# Altium PCB MFC.PcbDoc
Units mm, origin at the board's own origin, x right, y up, seen from the top; angles counter-clockwise.
Board outline 54.12 x 48.52 mm, 2 copper layers (Top Layer, Bottom Layer); 23 components, 32 nets, 102 pads, 91 vias.
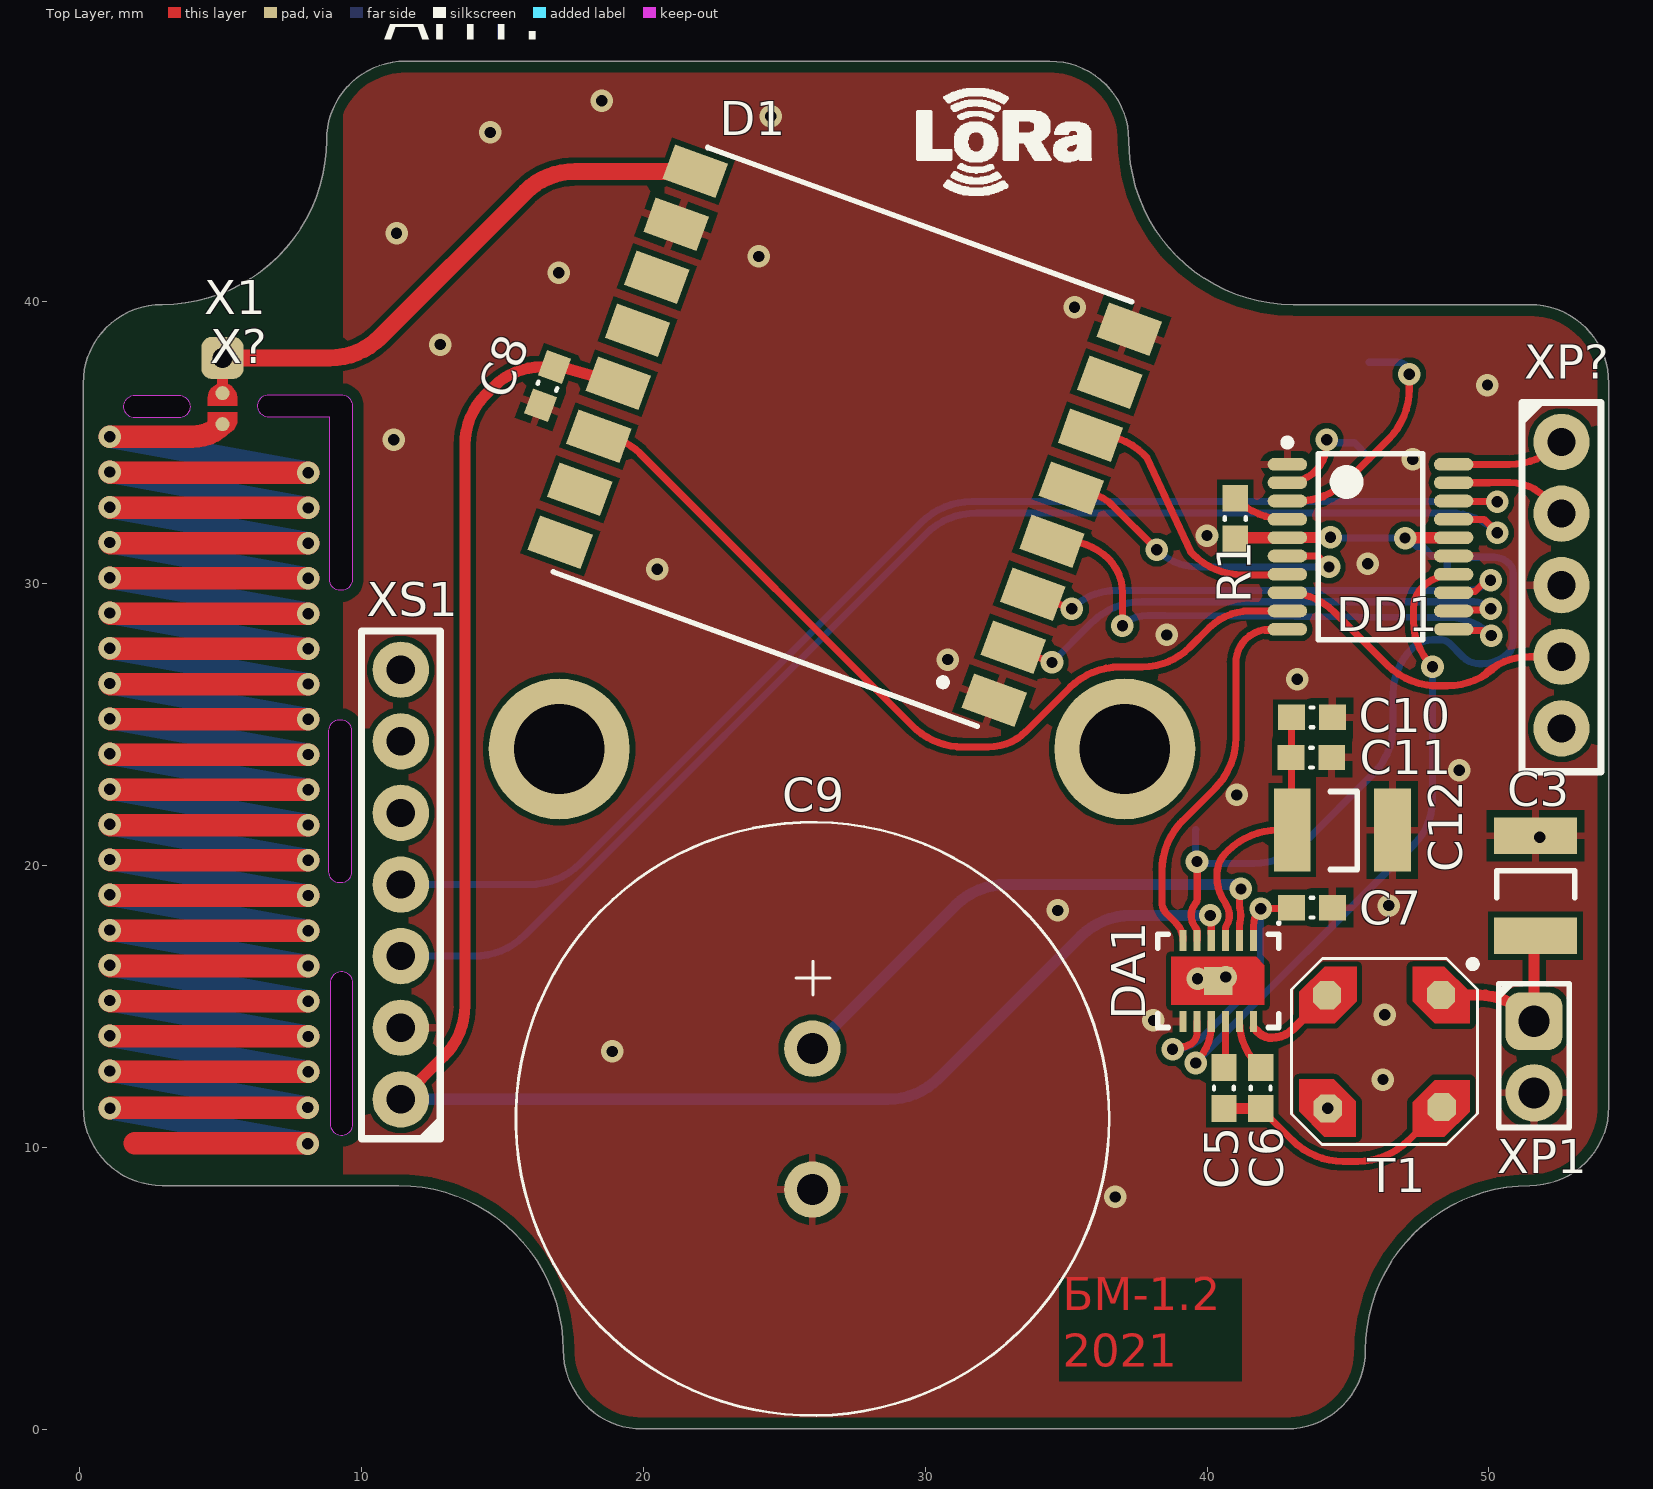
[diagram p0: Top Layer view]
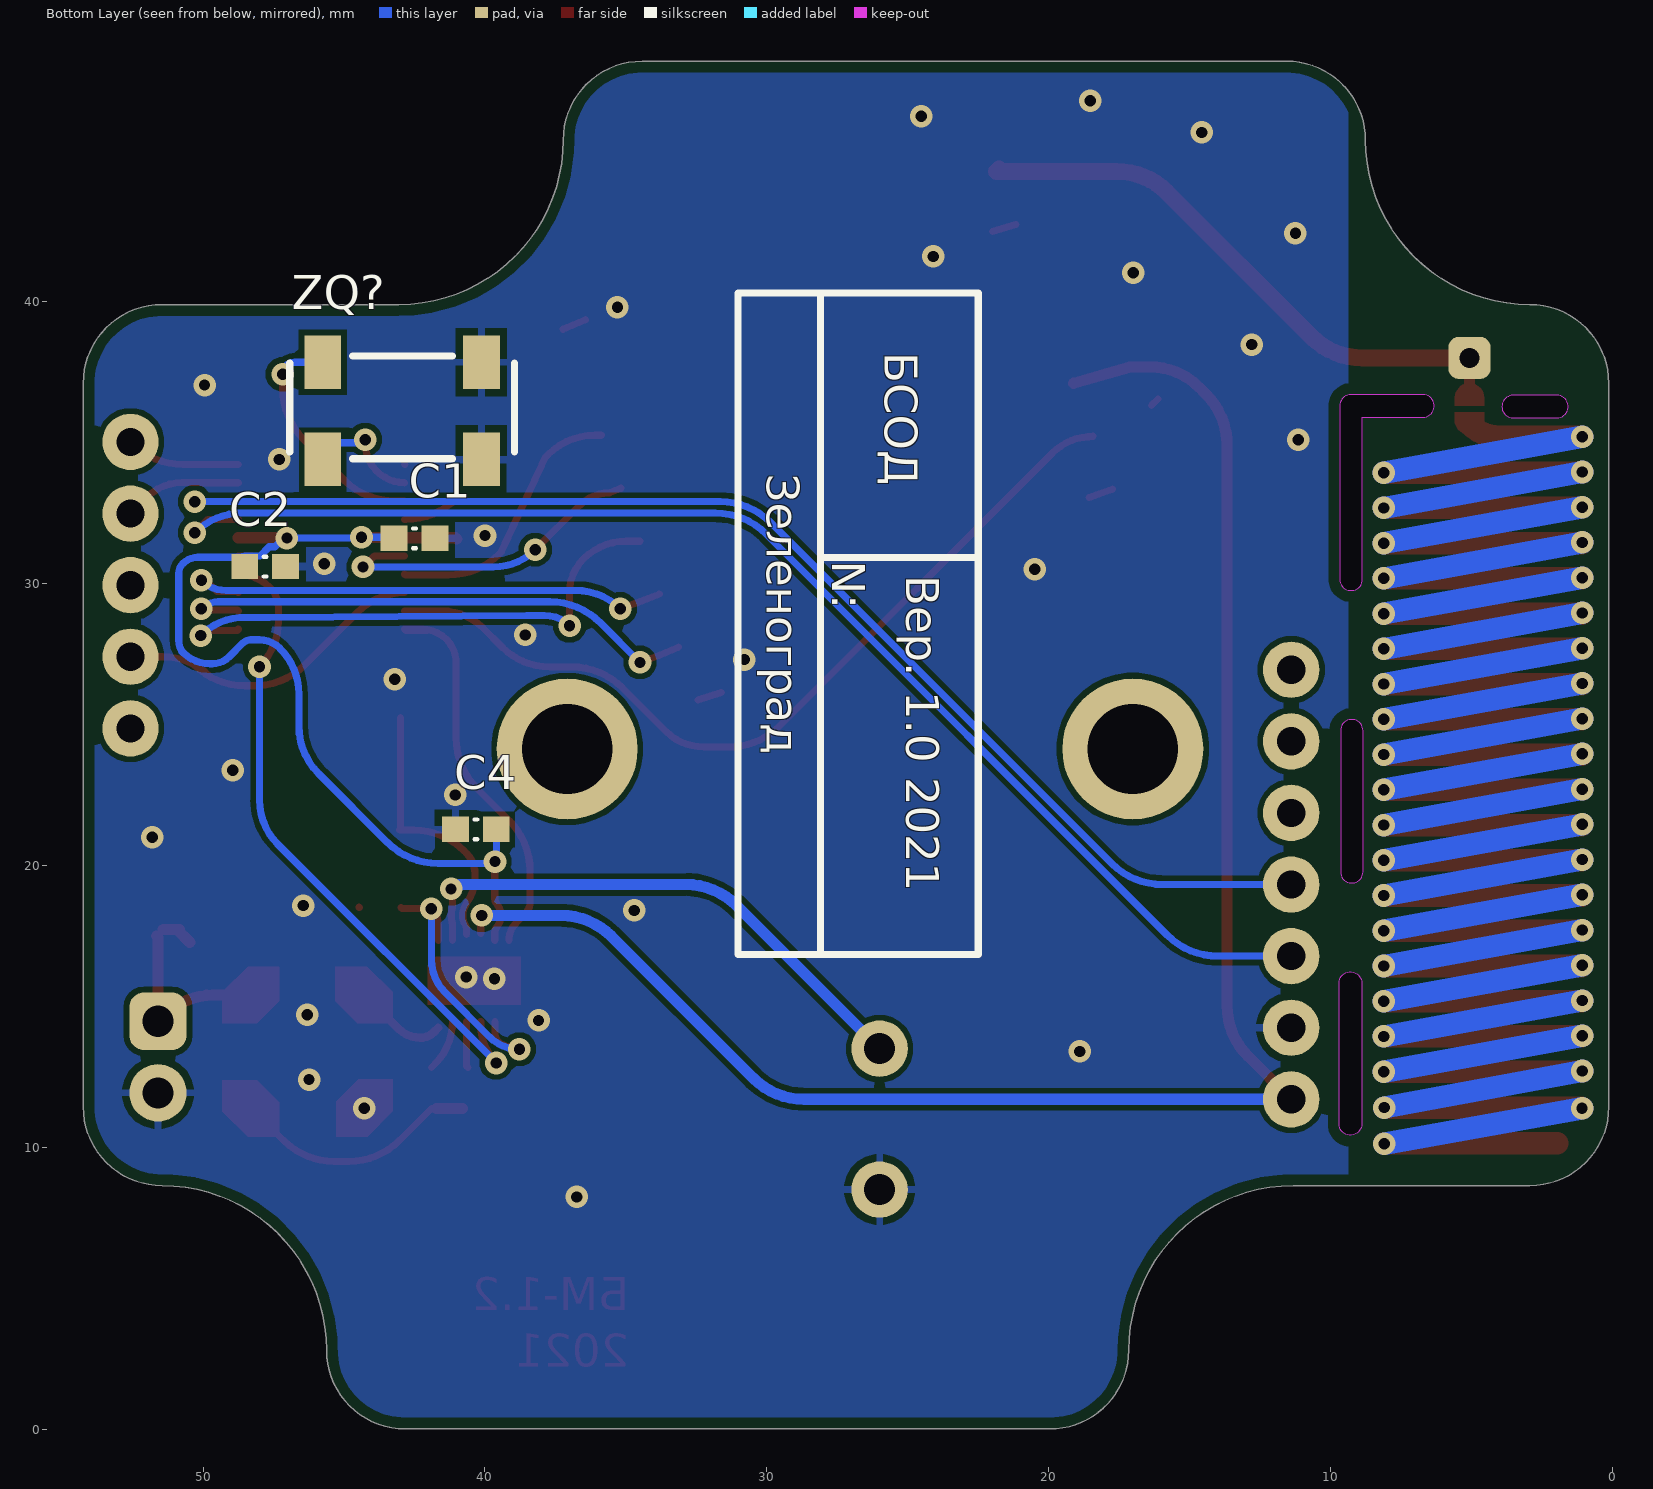
[diagram p1: Bottom Layer view, seen from below]

## Layer stack, top to bottom
Top Solder: solder mask 0.0102, Solder Resist, Dk 3.5
Top Layer: signal copper 0.0356
Dielectric 1: dielectric 0.32, FR-4, Dk 4.8
Bottom Layer: signal copper 0.0356
Bottom Solder: solder mask 0.0102, Solder Resist, Dk 3.5

## Board outline
2.933,8.637 11.33,8.637 cw(c11.33,2.806) 17.162,2.806 ccw(c19.962,2.806) 19.962,0.006 42.822,0.006 ccw(c42.822,2.806) 45.621,2.806 cw(c51.453,2.806) 51.453,8.637 ccw(c51.453,11.437) 54.253,11.437 54.253,37.097 ccw(c51.453,37.097) 51.453,39.896 43.055,39.896 cw(c43.055,45.728) 37.224,45.728 ccw(c34.424,45.728) 34.424,48.527 11.564,48.527 ccw(c11.564,45.728) 8.764,45.728 cw(c2.933,45.728) 2.933,39.896 ccw(c2.933,37.097) 0.133,37.097 0.133,11.437 ccw(c2.933,11.437)
cut-out: 6.725,35.9 cw(c6.725,36.3) 6.725,36.7 9.275,36.7 cw(c9.275,36.3) 9.675,36.3 9.675,30.15 cw(c9.275,30.15) 8.875,30.15 8.875,35.9
cut-out: 6.725,35.9 cw(c6.725,36.3) 6.725,36.7 9.275,36.7 cw(c9.275,36.3) 9.675,36.3 9.675,30.15 cw(c9.275,30.15) 8.875,30.15 8.875,35.9
cut-out: 1.975,35.875 cw(c1.975,36.275) 1.975,36.675 3.525,36.675 cw(c3.525,36.275) 3.925,36.275 cw(c3.525,36.275) 3.525,35.875
cut-out: 8.9,10.825 ccw(c9.3,10.825) 9.7,10.825 9.7,15.825 ccw(c9.3,15.825) 8.9,15.825
cut-out: 8.85,19.775 8.85,24.775 cw(c9.25,24.775) 9.65,24.775 9.65,19.775 cw(c9.25,19.775)

## Design rules (kind name [scope] priority, off if disabled: settings)
BoardOutlineClearance [All] p1: gap=0.4 ignorepadtopadclearanceinfootprint=FALSE
Clearance [All] p1: gap=0.2 ignorepadtopadclearanceinfootprint=FALSE except(0.125: Arc-Arc Arc-Track Arc-SMDPad Arc-THPad Arc-Via Arc-Text Track-Track Track-SMDPad Track-THPad Track-Via Track-Text SMDPad-Via SMDPad-Text THPad-THPad THPad-Via THPad-Text Via-Via Via-Text Fill-Text Poly-Text Region-Text Text-Text; 0.25: Arc-Hole Track-Hole SMDPad-Hole THPad-Hole Via-Hole Fill-Hole Poly-Hole Region-Hole Text-Hole)
ComponentClearance [All] p1: gap=0 collisioncheckmode=3 verticalgap=0.254 showdistances=FALSE
DiffPairsRouting [All] p1: maxlimit=0.254 minlimit=0.15 mostfreqgap=0.254 toplayer_minwidth=0.2 toplayer_maxwidth=0.381 toplayer_prefwidth=0.254 bottomlayer_minwidth=0.2 bottomlayer_maxwidth=0.381 bottomlayer_prefwidth=0.254 maxuncoupledlength=12.7
HoleSize [All] p1: absolutevalues=TRUE maxlimit=100 minlimit=0.3 maxpercent=80.000 minpercent=20.000
MinimumAnnularRing [All] p1: minimumring=0.15
MinimumSolderMaskSliver [All] p1: minsoldermaskwidth=0.15
PolygonConnect [All] p1: thpad.connectstyle=Relief thpad.reliefconductorwidth=0.254 thpad.reliefentries=4 thpad.polygonreliefangle="90 Angle" thpad.airgapwidth=0.254 smdpad.connectstyle=Relief smdpad.reliefconductorwidth=0.254 smdpad.reliefentries=4 smdpad.polygonreliefangle="90 Angle" smdpad.airgapwidth=0.254 via.connectstyle=Direct via.reliefconductorwidth=0.254 via.reliefentries=4 via.polygonreliefangle="90 Angle" via.airgapwidth=0.254
RoutingVias [All] p1: holewidth=0.4 width=0.8 viastyle="Through Hole" minholewidth=0.3 minwidth=0.8 maxholewidth=0.8 maxwidth=1.27
SilkToSilkClearance [All] p1 off: silktosilkclearance=0.15
SilkToSolderMaskClearance [IsPad] p1: minsilkscreentomaskgap=0.1 clearancetoexposedcopper=TRUE
SolderMaskExpansion [All] p1: expansion=0.102 istentingtop=FALSE
Width [All] p1: maxlimit=1 minlimit=0.125 preferedwidth=0.254
24 further rules are at their usual default settings.

## Components (designator, comment, footprint, x,y, rotation, side; value= is the part's Value field where it differs from the comment)
C1 "0,1 мк" C_0603 42.5,31.6 r0 bottom value=0.1µF
C2 "0,1 мк" C_0603 47.8,30.6 r0 bottom value=0.1µF
C3 "220 мк" B_CASE 51.65,19.275 r90 top value=220µF
C4 "0,1 мк" C_0603 40.325,21.275 r180 bottom value=0.1µF
C5 "1000" C_0603 40.6,12.1 r90 top value=1000pF
C6 "220" C_0603 41.9,12.1 r90 top value=220pF
C7 "2,2 мк" C_0603 43.725,18.5 r180 top value=2.2µF
C8 "0,1 мк" C_0603 16.6,37 r70 top value=0.1µF
C9 "1Ф 5,5В" EECF5R5U 26,11 r270 top locked
C10 "2,2 мк" C_0603 43.725,25.25 r180 top value=2.2µF
C11 "0,1 мк" C_0603 43.7,23.825 r180 top value=0.1µF
C12 "220 мк" B_CASE 44.8,21.25 r0 top value=220µF
D1 "RFM98W" RFM98W 37.343,40.043 r160 top
DA1 "LTC3108EDE" DFN-12 40.4,15.9 r270 top
DD1 "STM32L010F4P6" TSSOP-20 45.8,31.3 r0 top
R1 "10 к" R_0603 41,32.3 r90 top
T1 "1 : 100" LPR6235 46.3,13.3 r270 top
X1 "КТ" KT 5.075,38 r0 top
X? "Solder_jumper" Solder_jumper 5.075,36.225 r270 top
XP1 "PLS-2" PLS-2 51.6,13.2 r0 top
XP? "PLS-5" PLS-5 52.575,35.02 r270 top
XS1 "PBS-7" PBS-7 11.4,11.7 r90 top
ZQ? "KX-327S" KX-327S 42.9,36.375 r180 bottom

## Footprints (in the part's own frame and the unit in brackets; to place one, negate y for a bottom-side part, rotate by r counter-clockwise, add the part's x,y. Pads: shape width x height; smd on the part's side, far side on the other; paste and mask are expansions set on the pad)
B_CASE [mm] "Chip Capacitor, 2-Leads, Body 3,50x2,80mm, IPC Medium Density"
  rect 1.3x2.95 smd: 1(-1.778,0) 2(1.778,0)
  silkscreen extent -0.42,-1.4 0.53,1.37, body extent -1.85,-1.46 1.85,1.47, height 2.03
C_0603 [mm] "Chip Resistor, 2-Leads, Body 1.60x0.80mm, IPC Medium Density"
  rect 0.95x0.9 smd: 1(-0.725,0) 2(0.725,0)
  silkscreen extent -0.05,-0.35 0.05,0.35, body extent -0.8,-0.4 0.8,0.4, height 0.8
DFN-12 [mm] "SON, 12-Leads, Body 4.00x3.00mm, Pitch 0.50mm, Thermal Pad 3.30x1.70mm, IPC Medium Density"
  rect 0.75x0.25 smd: 1(-1.44,1.25) 2(-1.44,0.75) 3(-1.44,0.25) 4(-1.44,-0.25) 5(-1.44,-0.75) 6(-1.44,-1.25) 7(1.44,-1.25) 8(1.44,-0.75) 9(1.44,-0.25) 10(1.44,0.25) 11(1.44,0.75) 12(1.44,1.25)
  rect 1x1 smd: 13(0,0)
  Top Layer region: -0.855,-1.662 -0.855,1.338 -0.555,1.638 0.845,1.638 0.845,-1.662
  silkscreen extent -2.1,-2.15 1.65,2.2, body extent -1.5,-2 1.5,2, height 0.75
EECF5R5U [mm]
  round 2 hole 1.1: 1(-2.5,0) 2(2.5,0)
  silkscreen extent -10.53,-10.52 10.52,10.53, body extent -10.75,-10.75 10.76,10.75, height 8.01
KT [mm]
  rrect50% 1.5x1.5 hole 0.7: 1(0,0)
KX-327S [mm]
  rect 1.3x1.9 smd: 1(-2.85,-1.975) 2(2.775,-1.975) 3(2.775,1.475) 4(-2.85,1.475)
  silkscreen extent -4.03,-1.95 3.95,1.7, body extent -4.03,-2 3.97,1.7, height 2.5
LPR6235 [mm]
  oct 1x1 smd: 1(-2.1,2) 2(-2.091,-2.046) 3(1.921,-2.016) 4(1.875,2.025)
  Top Layer region: -3.1,2.121 -2.225,3.021 -1.1,3.021 -1.1,1.771 -1.875,0.996 -3.1,0.996
  Top Layer region: -3.1,-2.121 -2.225,-3.021 -1.1,-3.021 -1.1,-1.771 -1.875,-0.996 -3.1,-0.996
  Top Layer region: 2.021,-3.021 2.921,-2.146 2.921,-1.021 1.671,-1.021 0.896,-1.796 0.896,-3.021
  Top Layer region: 2.921,2.121 2.046,3.021 0.921,3.021 0.921,1.771 1.696,0.996 2.921,0.996
  silkscreen extent -3.4,-3.3 3.2,3.3, body extent -3.17,-3.01 2.91,3.07, height 3.35
PBS-7 [mm]
  round 2 hole 1: 1(0,0) 2(2.54,0) 3(5.08,0) 4(7.62,0) 5(10.16,0) 6(12.7,0) 7(15.24,0)
  silkscreen extent -1.4,-1.4 16.61,1.4, body extent -1.27,-1.27 16.51,1.27, height 8.5
PLS-2 [mil] "PLS-2 вилка штыревая 2.54мм 1x2 прямая"
  rrect50% 80x80 hole 43.31: 1(0,50)
  round 80 hole 43.31: 2(0,-50)
  silkscreen extent -49,-98 49,102, body extent -49,-100 49,100, height 335
PLS-5 [mm]
  round 2 hole 1: 1(0,0) 2(2.54,0) 3(5.08,0) 4(7.62,0) 5(10.16,0)
  silkscreen extent -1.4,-1.4 11.7,1.4, body extent -1.2,-1.3 11.5,1.24, height 8.54
R_0603 [mm] "Chip Resistor, 2-Leads, Body 1.60x0.80mm, IPC Medium Density"
  rect 0.95x0.9 smd: 1(-0.725,0) 2(0.725,0)
  silkscreen extent -0.05,-0.38 0.05,0.38, body extent -0.8,-0.45 0.75,0.4, height 0.45
RFM98W [mm]
  rect 2x1.3 smd: 1(-0.25,15) 2(-0.25,13) 3(-0.25,11) 4(-0.25,9) 5(-0.25,7) 6(-0.25,5) 7(-0.25,3) 8(-0.25,1) 9(16.125,1) 10(16.125,3) 11(16.125,5) 12(16.125,7) 13(16.125,9) 14(16.125,11) 15(16.125,13) 16(16.125,15)
  silkscreen extent 0,0.05 16,16.08, body extent -0.02,-0.03 15.98,15.97, height 2.04
Solder_jumper [mm]
  rrect100% 0.5x0.5 smd: 1(-0.525,0) 2(0.575,0)
  Top Layer region: -0.075,0.525 -0.3,0.525 -0.518,0.497 -0.709,0.387 -0.843,0.212 -0.9,0 -0.9,0 -0.837,-0.216 -0.696,-0.392 -0.499,-0.5 -0.275,-0.525 -0.275,-0.525 -0.075,-0.525
  Top Layer region: 0.144,-0.519 0.369,-0.519 0.587,-0.491 0.777,-0.381 0.911,-0.207 0.969,0.006 0.969,0.006 0.906,0.222 0.765,0.398 0.567,0.506 0.344,0.531 0.344,0.531 0.144,0.531
TSSOP-20 [mm] "TSOP, 20-Leads, Body 6,50x4,40mm, Pitch 0,65mm, IPC Medium Density"
  oval 1.4x0.45 smd: 1(-2.95,2.925) 2(-2.95,2.275) 3(-2.95,1.625) 4(-2.95,0.975) 5(-2.95,0.325) 6(-2.95,-0.325) 7(-2.95,-0.975) 8(-2.95,-1.625) 9(-2.95,-2.275) 10(-2.95,-2.925) 11(2.95,-2.925) 12(2.95,-2.275) 13(2.95,-1.625) 14(2.95,-0.975) 15(2.95,-0.325) 16(2.95,0.325) 17(2.95,0.975) 18(2.95,1.625) 19(2.95,2.275) 20(2.95,2.925)
  silkscreen extent -3.07,-3.3 1.85,3.82, body extent -3.3,-3.3 3.3,3.3, height 1.2

## Part data
C1 C2 C4 C8 C11: library part GRM188R72A104MA35D, "CAP CER 0.1UF 100V X7R 0603", Manufacturer="Murata Electronics", Component Type=Capasitor, ComponentLink1Description=Datasheet, ComponentLink1URL=https://search.murata.co.jp/Ceramy/image/img/A01X/G101/ENG/GRM188R72A104MA35-01.pdf, Part Number=GRM188R72A104MA35D
C3 C12: library part TAJB227K002RNJ, "CAP TANT 220UF 10% 2.5V 1411", Manufacturer="AVX Corporation", Component Type="Tantalum Capacitor", ComponentLink1Description=Datasheet, ComponentLink1URL=http://datasheets.avx.com/TAJ.pdf, Part Number=TAJB227K002RNJ
C5: library part GRM1885C1H102FA01J, "CAP CER 1000PF 50V C0G/NP0 0603", Manufacturer="Murata Electronics", Component Type=Capasitor, ComponentLink1Description=Datasheet, ComponentLink1URL=https://www.murata.com/~/media/webrenewal/support/library/catalog/products/capacitor/mlcc/c02e.ashx?la=en-us, Part Number=GRM1885C1H102FA01J
C6: library part GRM1885C2A221FA01D, "CAP CER 220PF 100V C0G/NP0 0603", Manufacturer="Murata Electronics", Component Type=Capasitor, ComponentLink1Description=Datasheet, ComponentLink1URL=https://www.murata.com/~/media/webrenewal/support/library/catalog/products/capacitor/mlcc/c02e.ashx?la=en-us, Part Number=GRM1885C2A221FA01D
C7 C10: library part GRM188R61E225MA12D, "CAP CER 2.2UF 25V X5R 0603", Manufacturer="Murata Electronics", Component Type=Capasitor, ComponentLink1Description=Datasheet, ComponentLink1URL=https://search.murata.co.jp/Ceramy/image/img/A01X/G101/ENG/GRM188R61E225MA12-01.pdf, Part Number=GRM188R61E225MA12D
C9: library part EECF5R5U105, "1 Ф, 5.5 В, 5 мм, 2208H, Ионистор"
D1: "LoRa modem"
DA1: "Ultralow Voltage Step-Up Converter and Power Manager"
R1: library part CR0603-FX-1002ELF, "RES SMD 10K OHM 1% 1/10W 0603", Manufacturer="Bourns Inc.", Component Type=Resistor, ComponentLink1Description=Datasheet, ComponentLink1URL=https://www.bourns.com/pdfs/chpreztr.pdf, Part Number=CR0603-FX-1002ELF
T1: library part LPR6235-752SMR, "Coupled Inductor"
ZQ?: "Кварцевый резонатор 32.768 кГц, 20 ppm"

## Free pads (board coordinates)
  round 5 hole 3.2: 0(17.018,24.13) 0(37.084,24.13)

## Via types
v1: diameter 0.8, hole 0.4, Top Layer to Bottom Layer, tented both sides, 91 vias

## Nets (pads, with @x,y where several pads share a name; then routed paths per layer and width w, separated by ;. In a path a pad name is that pad's centre, name@x,y a point inside that pad or via, vN(x,y) a via of type N, cw(c..) or ccw(c..) an arc to the next point about the centre after c; other vN are vias at no path point)
2V2: C1.2 C2.2 C4.2 DA1.5 DD1.5 DD1.16 R1.1 | length 37
  Top Layer w0.256: v1@39.645,19.987 v1(39.645,20.134) 39.65,20.129 39.65,18.815 cw(c39.394,18.816) 39.592,18.655 ccw(c40.116,18.224) 39.438,18.197 ccw(c40.116,18.224) 39.573,17.818 ccw(c40.116,18.224) 39.592,17.792 cw(c39.394,17.631) 39.65,17.632 39.65,17.362 DA1.5
  Top Layer w0.4: R1.1 41.05,31.625 DD1.5 42.859,31.634 44.37,31.634 v1(44.379,31.643) ; v1(47.027,31.611) 47.038,31.623 48.748,31.623 DD1.16
  Bottom Layer w0.256: C4.2 39.593,21.268 39.593,20.186 v1(39.645,20.134) 39.708,20.071 41.669,20.071 ccw(c41.669,22.611) 43.465,20.815 45.9,23.25 ccw(c44.21,24.94) 46.6,24.94 46.6,26.072 cw(c48.903,26.072) 46.718,26.801 cw(c48.903,26.072) 46.777,26.959 cw(c48.903,26.072) 47.275,27.701 cw(c47.997,26.979) 47.997,28 48.315,28 cw(c48.3,27.578) 48.599,27.876 49.075,27.4 ccw(c49.679,28.004) 49.679,27.15 49.75,27.15 ccw(c49.75,28.5) 50.705,27.546 50.756,27.597 ccw(c50.052,27.998) 50.862,27.998 50.862,30.358 ccw(c50.367,30.358) 50.717,30.708 ccw(c50.188,30.179) 50.188,30.927 48.994,30.927 cw(c48.994,33.294) C2.2@48.525,30.974 ; C1.2 43.268,31.643 v1(44.379,31.643) 44.411,31.611 47.141,31.611 47.449,31.303 47.655,31.303 47.984,30.974 C2.2@48.525,30.974 ; C2.2 C2.2@48.525,30.974
ANTENNA: X?.2 | length 287.1
  Top Layer w0.8: v1(1.077,12.705) 1.102,12.681 v1(8.113,12.681) ; v1(1.077,13.955) 1.102,13.931 v1(8.113,13.931) ; v1(1.077,15.205) 1.102,15.181 v1(8.113,15.181) ; v1(1.077,16.455) 1.102,16.431 v1(8.113,16.431) ; v1(1.077,17.705) 1.102,17.681 v1(8.113,17.681) ; v1(1.077,18.955) 1.102,18.931 v1(8.113,18.931) ; v1(1.077,20.205) 1.102,20.181 v1(8.113,20.181) ; v1(1.077,21.455) 1.102,21.431 v1(8.113,21.431) ; v1(1.077,22.705) 1.102,22.681 v1(8.113,22.681) ; v1(1.077,23.955) 1.102,23.931 v1(8.113,23.931) ; v1(1.077,25.205) 1.102,25.181 v1(8.113,25.181) ; v1(1.077,26.455) 1.102,26.431 v1(8.113,26.431) ; v1(1.077,27.705) 1.102,27.681 v1(8.113,27.681) ; v1(1.077,28.955) 1.102,28.931 v1(8.113,28.931) ; v1(1.077,30.205) 1.102,30.181 v1(8.113,30.181) ; v1(1.077,31.455) 1.102,31.431 v1(8.113,31.431) ; v1(1.077,32.705) 1.102,32.681 v1(8.113,32.681) ; v1(1.077,33.955) 1.102,33.931 v1(8.113,33.931) ; v1(1.077,35.205) 4.001,35.205 ccw(c4.001,36.724) X?.2 ; v1(1.082,11.385) 1.091,11.394 8.083,11.394 v1(8.097,11.408) ; 1.962,10.135 8.09,10.135 v1(8.1,10.125)
  Bottom Layer w0.8: v1(1.077,12.705) v1(8.097,11.408) ; v1(1.077,13.955) 6.838,12.912 v1(8.113,12.681) ; v1(1.077,15.205) v1(8.113,13.931) ; v1(1.077,16.455) v1(8.113,15.181) ; v1(1.077,17.705) v1(8.113,16.431) ; v1(1.077,18.955) v1(8.113,17.681) ; v1(1.077,20.205) v1(8.113,18.931) ; v1(1.077,21.455) v1(8.113,20.181) ; v1(1.077,22.705) v1(8.113,21.431) ; v1(1.077,23.955) v1(8.113,22.681) ; v1(1.077,25.205) v1(8.113,23.931) ; v1(1.077,26.455) v1(8.113,25.181) ; v1(1.077,27.705) v1(8.113,26.431) ; v1(1.077,28.955) v1(8.113,27.681) ; v1(1.077,30.205) v1(8.113,28.931) ; v1(1.077,31.455) v1(8.113,30.181) ; v1(1.077,32.705) v1(8.113,31.431) ; v1(1.077,33.955) v1(8.113,32.681) ; v1(1.077,35.205) v1(8.113,33.931) ; v1(1.082,11.385) v1(8.1,10.125)
GND: C1.1 C2.1 C3.2 C4.1 C7.1 C8.1 C9.2 C10.1 C11.1 C12.2 D1.1 D1.8 D1.10 DA1.7 DA1.13 DD1.1 DD1.15 T1.3 XP1.2 XP?.3 XS1.2 ZQ?.2 ZQ?.3 | length 3.8
  Top Layer w0.254: C8.1@16.129,36.541 C8.1 ; D1.10 D1.10@22,42.482 ; D1.1@31.616,26.13 D1.1 ; D1.8@36.429,39.353 D1.8 ; DA1.13 40.524,15.9 v1(40.662,16.038) ; DD1.1@42.846,34.221 DD1.1 ; C7.1 C7.1@44.465,18.515 ; DD1.15@48.275,30.975 DD1.15
  Top Layer w0.4: XP1.2@51.57,11.9 XP1.2
  other v1: 36.747,8.237 44.284,11.379 46.241,12.402 18.9,13.4 38.1,14.5 46.3,14.7 39.665,15.976 34.7,18.4 46.45,18.575 51.8,21 41.05,22.5 48.95,23.375 43.2,26.6 30.8,27.3 38.575,28.175 20.5,30.5 45.7,30.7 40,31.7 47.3,34.4 11.15,35.1 49.947,37.037 12.8,38.475 35.3,39.8 17,41.025 24.1,41.6 11.25,42.425 14.575,46 24.525,46.575 18.525,47.125
I2C_SCL: DD1.17 XS1.3 | length 47.1
  Top Layer w0.254: DD1.17 49.825,32.275 v1(50.3,31.8)
  Bottom Layer w0.254: XS1.3 13.999,16.78 ccw(c13.999,19.32) 15.795,17.524 30.027,31.756 cw(c31.823,29.96) 31.823,32.5 48.61,32.5 cw(c48.61,30.11) 49.939,32.096 cw(c48.61,30.11) v1(50.3,31.8)
I2C_SDA: DD1.18 XS1.4 | length 45.9
  Top Layer w0.254: DD1.18 48.763,32.912 50.288,32.912 v1(50.3,32.9)
  Bottom Layer w0.254: XS1.4 15.968,19.32 ccw(c15.968,21.86) 17.764,20.064 29.86,32.16 cw(c31.656,30.364) 31.656,32.904 50.296,32.904 v1(50.3,32.9)
LOAD_SW: DA1.9 DD1.14 | length 23.4
  Top Layer w0.254: v1(39.605,12.988) cw(c39.857,12.962) 39.677,13.141 39.858,13.322 ccw(c39.643,13.457) 39.885,13.381 cw(c40.15,13.3) 39.939,13.48 ccw(c39.744,13.643) 39.968,13.522 ccw(c39.744,13.643) 39.973,13.533 ccw(c38.272,14.328) 40.15,14.328 DA1.9 ; v1(47.998,27.05) cw(c49.623,28.675) 47.325,28.675 47.325,29.126 cw(c48.349,29.126) 47.625,29.85 47.64,29.865 cw(c48.75,28.756) DD1.14
  Bottom Layer w0.254: v1(39.605,12.988) cw(c39.83,12.871) 39.649,13.049 47.35,20.75 ccw(c45.781,22.319) 48,22.319 48,27.048 v1(47.998,27.05)
LORA_DIO0: D1.14 DD1.9 | length 31
  Top Layer w0.254: DD1.9 41.524,29.025 ccw(c41.524,26.976) 40.075,28.425 39.388,27.738 cw(c37.702,29.423) 38.438,27.156 cw(c37.702,29.423) 37.702,27.039 36.916,27.039 ccw(c36.916,24.499) 35.12,26.295 33.579,24.754 cw(c32.242,26.09) 32.242,24.2 31.352,24.2 cw(c31.352,26.74) 30.266,24.444 cw(c31.352,26.74) 29.556,24.944 19.88,34.62 ccw(c18.428,33.168) D1.14@19.006,35.138 ; D1.14@19.006,35.138 ccw(c18.428,33.168) D1.14 D1.14@19.006,35.138
LORA_DIO1: D1.15 | length 0.9
  Top Layer w0.254: D1.15 D1.15@18.566,33.047
LORA_MISO: D1.2 DD1.12 | length 19.2
  Top Layer w0.254: D1.2 33.938,27.404 v1(34.5,27.2) ; DD1.12 48.788,29.063 50.023,29.063 v1(50.062,29.101)
  Bottom Layer w0.254: v1(34.5,27.2) 35.906,28.606 cw(c37.702,26.81) 37.702,29.35 49.462,29.35 cw(c49.462,28.501) 49.952,29.194 cw(c49.462,28.501) v1(50.062,29.101)
LORA_MOSI: D1.3 DD1.13 | length 18.1
  Top Layer w0.254: D1.3 34.631,29.307 v1(35.2,29.1) ; DD1.13 48.788,29.713 49.51,29.713 49.911,30.113 v1(50.058,30.113)
  Bottom Layer w0.254: v1(35.2,29.1) cw(c36.779,27.521) 36.543,29.741 ccw(c36.515,29.994) 36.566,29.745 cw(c36.65,29.35) 36.65,29.754 49.192,29.754 ccw(c49.192,30.979) 49.634,29.837 ccw(c49.192,30.979) v1(50.058,30.113)
LORA_NSS: D1.5 DD1.6 | length 11.7
  Top Layer w0.254: D1.5 35.589,33.215 cw(c35.589,31.742) 36.63,32.784 ; 36.63,32.783 v1(38.213,31.2) ; DD1.6 43.925,30.975 44.313,30.587 v1(44.327,30.587)
  Bottom Layer w0.254: v1(38.213,31.2) ccw(c39.694,32.68) 38.614,30.887 ccw(c39.694,32.68) 39.694,30.587 v1(44.327,30.587)
LORA_RST: D1.6 DD1.7 | length 9.6
  Top Layer w0.254: D1.6 36.106,35.259 cw(c36.106,32.928) 37.754,34.576 37.86,34.47 39.418,31.122 39.496,31.044 ccw(c41.292,32.84) 41.292,30.3 42.825,30.3 DD1.7
LORA_SCK: D1.4 DD1.11 | length 19.5
  Top Layer w0.254: D1.4 34.993,31.5 cw(c34.993,29.359) 36.507,30.873 cw(c35.316,29.682) 37,29.682 v1(37,28.5) ; DD1.11 48.788,28.337 49.753,28.337 49.939,28.152 v1(50.087,28.152)
  Bottom Layer w0.254: v1(37,28.5) cw(c37.885,27.615) 37.013,28.513 cw(c37.885,27.615) 37.885,28.867 38.525,28.867 47.65,28.798 48.526,28.798 cw(c48.526,26.591) 48.714,28.79 cw(c48.526,26.591) 49.803,28.391 cw(c48.526,26.591) v1(50.087,28.152)
NetC3_1: C3.1 T1.1 XP1.1 | length 7.9
  Top Layer w0.4: T1.1 49.618,15.4 ; 49.671,15.4 49.618,15.4 ; C3.1@50.473,17.272 C3.1@50.923,17.722 ; C3.1@50.837,17.722 C3.1@50.923,17.722 ; C3.1@51.425,17.722 C3.1@50.923,17.722 ; C3.1 51.6,17.447 XP1.1 51.414,14.656 ccw(c49.618,12.86) 49.618,15.4
NetC5_1: C5.1 C6.1 T1.4 | length 8.7
  Top Layer w0.254: C6.1@41.875,11.375 C6.1@41.888,11.363 ; C6.1 43.031,10.244 ccw(c44.827,12.04) 44.827,9.5 45.348,9.5 ccw(c45.348,12.04) 47.144,10.244 T1.4
  Top Layer w0.4: C5.1@40.8,11.375 C6.1@41.721,11.375
NetC5_2: C5.2 DA1.10 | length 1.7
  Top Layer w0.254: C5.2 40.65,12.875 DA1.10
NetC6_2: C6.2 DA1.11 | length 1.9
  Top Layer w0.254: DA1.11 ccw(c43.287,14.46) 41.594,13.156 ccw(c43.287,14.46) 41.776,12.949 C6.2
NetC7_2: C7.2 DA1.1 DA1.8 | length 10.4
  Top Layer w0.254: v1(38.777,13.475) 38.87,13.568 39.191,13.568 ccw(c39.158,13.82) 39.278,13.596 cw(c39.6,13) 39.385,13.642 ccw(c39.304,13.883) 39.45,13.675 39.511,13.736 ccw(c39.181,14.066) 39.648,14.066 DA1.8@39.648,14.458 ; DA1.1 41.65,17.857 cw(c42.51,17.857) v1(41.902,18.465) 42.94,18.465 C7.2@42.975,18.5
  Bottom Layer w0.254: v1(38.777,13.475) ccw(c38.777,14.979) 39.84,13.915 ; 39.841,13.916 41.413,15.488 ccw(c40.231,16.669) 41.902,16.669 v1(41.902,18.465)
NetC9_1: C9.1 DA1.2 | length 19.4
  Top Layer w0.254: DA1.2 41.15,17.875 cw(c41.404,17.874) 41.159,17.939 ccw(c40.116,18.224) 41.159,18.508 cw(c41.404,18.573) 41.15,18.572 41.15,19.034 cw(c41.334,19.034) v1(41.204,19.165)
  Bottom Layer w0.4: C9.1 31.077,18.577 cw(c32.873,16.781) 32.873,19.321 40.826,19.321 cw(c40.826,18.787) v1(41.204,19.165)
NetC10_2: C10.2 C11.2 C12.1 DA1.3 | length 9.7
  Top Layer w0.254: DA1.3@40.652,17.547 40.65,17.549 40.65,17.729 cw(c40.904,17.728) 40.688,17.863 ccw(c40.116,18.224) 40.688,18.585 cw(c40.904,18.719) 40.656,18.662 cw(c41.886,19.583) 40.35,19.583 40.35,19.675 cw(c41.436,19.675) 40.668,20.443 40.731,20.506 cw(c42.527,18.71) 42.527,21.25 C12.1 cw(c43.075,21.303) 43,21.303 C10.2
NetD1_9: D1.9 X1.1 X?.1 | length 20.7
  Top Layer w0.4: X?.1 X1.1
  Top Layer w0.6: X1.1 8.873,38 ccw(c8.873,40.54) 10.669,38.744 15.799,43.874 cw(c17.595,42.078) 17.595,44.618 D1.9 D1.9@21.76,44.706
NetDA1_6: DA1.6 DD1.10 | length 14.4
  Top Layer w0.254: DA1.6 ccw(c38.281,17.34) 39.03,17.78 ccw(c38.281,17.34) 38.975,17.863 ccw(c38.281,17.34) 38.895,17.955 38.577,18.273 cw(c39.004,18.7) 38.4,18.7 38.4,19.798 cw(c40.94,19.798) 38.975,21.407 cw(c40.94,19.798) 39.144,21.594 40.281,22.731 ccw(c38.485,24.527) 41.025,24.527 41.025,27.18 ; 42.063,28.338 42.813,28.338 DD1.10 42.22,28.375 ccw(c42.22,27.18) 41.375,28.025 ccw(c42.22,27.18) 41.032,27.307 ; 41.025,27.18 cw(c42.22,27.18) 41.032,27.307 ; 41.025,27.18 41.025,27.3 41.032,27.307
NetDA1_12: DA1.12 T1.2 | length 3.3
  Top Layer w0.3: DA1.12@41.652,14.245 41.818,14.079 ccw(c42.292,14.552) 42.292,13.882 ccw(c42.292,14.979) 43.067,14.204 T1.2
NetDD1_2: DD1.2 ZQ?.1 | length 4.2
  Top Layer w0.254: DD1.2 ccw(c42.85,34.975) 44.095,34.335 ccw(c42.85,34.975) 44.25,34.955 ccw(c42.85,34.975) 44.25,34.975 v1(44.25,35.103)
  Bottom Layer w0.254: v1(44.25,35.103) 44.398,35.103 44.507,34.993 45.227,34.993 45.75,34.47 ZQ?.1
NetDD1_3: DD1.3 ZQ?.4 | length 9.5
  Top Layer w0.254: DD1.3 DD1.3@43.198,32.925 ; 44.133,33.075 cw(c43.273,35.465) 43.273,32.925 DD1.3@43.198,32.925 ; v1(47.175,37.425) 47.175,36.902 cw(c44.635,36.902) 46.431,35.106 44.994,33.669 cw(c43.198,35.465) DD1.3@43.198,32.925
  Bottom Layer w0.254: ZQ?.4 46.75,37.85 cw(c46.75,37.425) v1(47.175,37.425)
NetDD1_4: DD1.4 R1.2 | length 2.1
  Top Layer w0.254: R1.2 41.006,33.019 ccw(c42.802,34.815) 42.802,32.275 DD1.4
SENS_RDY: XS1.5
SWCLK: DD1.20 XP?.1 | length 4
  Top Layer w0.254: DD1.20 50.728,34.225 ccw(c50.728,36.765) 51.93,34.527 ccw(c50.728,36.765) 52.524,34.969 XP?.1
SWDIO: DD1.19 XP?.2 | length 4.2
  Top Layer w0.254: DD1.19 50.018,33.575 50.02,33.577 50.749,33.577 cw(c50.749,31.817) XP?.2@51.993,33.062 ; XP?.2@51.994,33.061 XP?.2
UART_RX: XP?.5
UART_TX: DD1.8 XP?.4 | length 11.8
  Top Layer w0.254: DD1.8 cw(c42.85,27.321) 44.514,28.986 46.383,27.117 ccw(c48.179,28.913) 47.794,26.402 cw(c47.754,26.152) 47.82,26.397 ccw(c47.998,27.05) 47.998,26.373 ccw(c47.998,27.05) 48.047,26.375 cw(c48.064,26.121) 48.074,26.375 ccw(c48.179,28.913) 48.179,26.373 48.521,26.373 ccw(c48.521,28.913) 50.317,27.117 50.323,27.123 ; 49.75,26.7 cw(c51.44,25.01) 50.323,27.123 ; XP?.4 51.44,27.4 ccw(c51.44,25.01) 50.323,27.123
VDD_: C8.2 D1.13 DA1.4 XS1.1 | length 63
  Top Layer w0.254: v1(40.116,18.224) 40.148,18.191 DA1.4@40.148,17.588
  Top Layer w0.4: XS1.1 12.931,13.231 ccw(c11.135,15.027) 13.675,15.027 13.675,34.915 cw(c16.215,34.915) 14.419,36.711 14.675,36.967 cw(c16.398,35.244) 16.398,37.681 C8.2 17.101,37.681 17.114,37.681 17.157,37.665 17.982,37.427 18.342,37.323 D1.13
  Bottom Layer w0.4: XS1.1 28.678,11.7 ccw(c28.678,14.24) 30.474,12.444 35.51,17.48 cw(c37.306,15.684) 37.306,18.224 v1(40.116,18.224)
pads on no net: D1.7 D1.11 D1.12 D1.16 XS1.6 XS1.7

## Polygon pours and split planes (outlines as drawn)
GND on Bottom Layer "NONET_L-01_P-001" (solid, remove dead copper, pour order 0): 9.375,-0.911 9.375,50.8 55.372,50.8 55.372,-1.016
GND on Top Layer "NONET_L-01_P-001" (solid, remove dead copper, pour order 2): 9.35,-0.758 9.35,50.955 54.465,50.955 54.465,-0.861

## Other copper
Top Layer:
  text "БМ-1.2 / 2021" at 34.885,1.825 h2

## Silkscreen, mask and mechanical layers (free items; w line width, h text height)
Top Overlay:
  drawing of 478 lines, arcs and shapes, not listed
  text "АНТ." at 10.8,48.7 h3
  text "SWD" at 58.1,28.7 h3 r90
  text "ПИТ." at 58.2,11.2 h3 r90
Bottom Overlay:
  lines w0.25: 28.022,30.928 22.501,30.928 22.501,40.3 ; 28.104,16.958 28.104,40.3 ; 22.501,40.3 22.501,16.831 31.025,16.831 31.025,40.3 22.501,40.3
  text "БСОД" at 26.2,38.2 h2 r90
  text "Зеленоград" at 30.4,33.9 h2 r90
  text "N:" at 28.078,30.811 h2 r90
  text "Вер. 1.0 2021" at 25.437,30.293 h2 r90
Top Solder:
  rectangle: -1.575,-4.241 9.366,36.35
  rectangle: 34.575,1.55 41.396,5.514
Bottom Solder:
  rectangle: -1.575,-4.266 9.366,36.325
Mechanical 2:
  lines w0.1: 8.756,42.695 ccw(c8.756,42.704) 8.764,42.704 ; 0.133,11.437 ccw(c2.933,11.437) 2.933,8.637 11.33,8.637 cw(c11.33,2.806) 17.162,2.806 ccw(c19.962,2.806) 19.962,0.006 42.822,0.006 ccw(c42.822,2.806) 45.621,2.806 cw(c51.453,2.806) 51.453,8.637 ccw(c51.453,11.437) 54.253,11.437 54.253,37.097 ccw(c51.453,37.097) 51.453,39.896 43.055,39.896 cw(c43.055,45.728) 37.224,45.728 ccw(c34.424,45.728) 34.424,48.527 11.564,48.527 ccw(c11.564,45.728) 8.764,45.728 cw(c2.933,45.728) 2.933,39.896 ccw(c2.933,37.097) 0.133,37.097 0.133,11.437
  lines w0.8: 1.625,36.275 3.525,36.275 ; 6.725,36.3 9.275,36.3 9.275,30.15 ; 9.25,19.775 9.25,26.85 ; 9.3,10.825 9.3,16.775